# Altium PCB 2012_PerfUSB.PcbDoc
Units mil, origin at the board's own origin, x right, y up, seen from the top; angles counter-clockwise.
Board outline 690 x 1930 mil, 4 copper layers (1-TOP, 2-Signal, 3-GND, 4-BOT); 19 components, 18 nets, 82 pads, 27 vias.
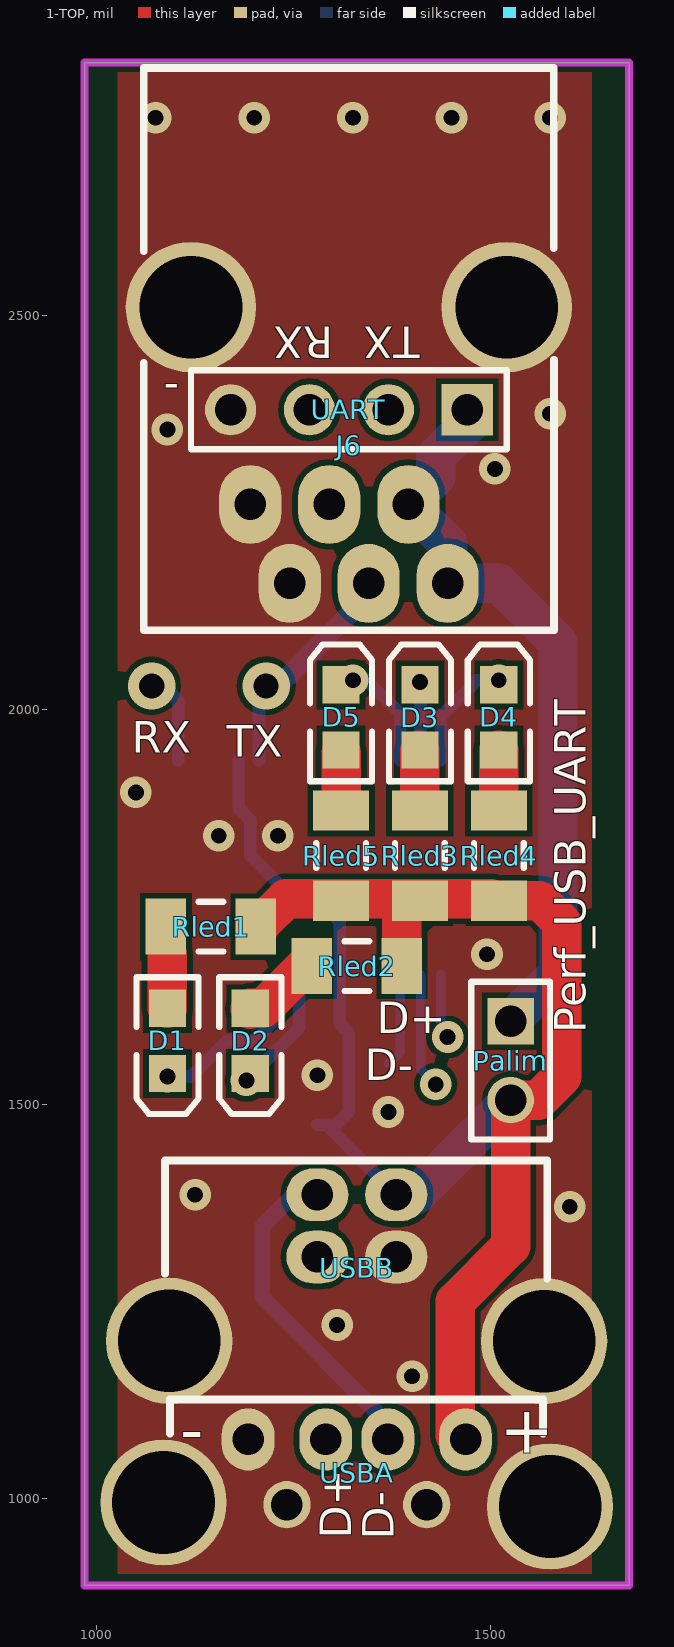
[diagram p0: 1-TOP view]
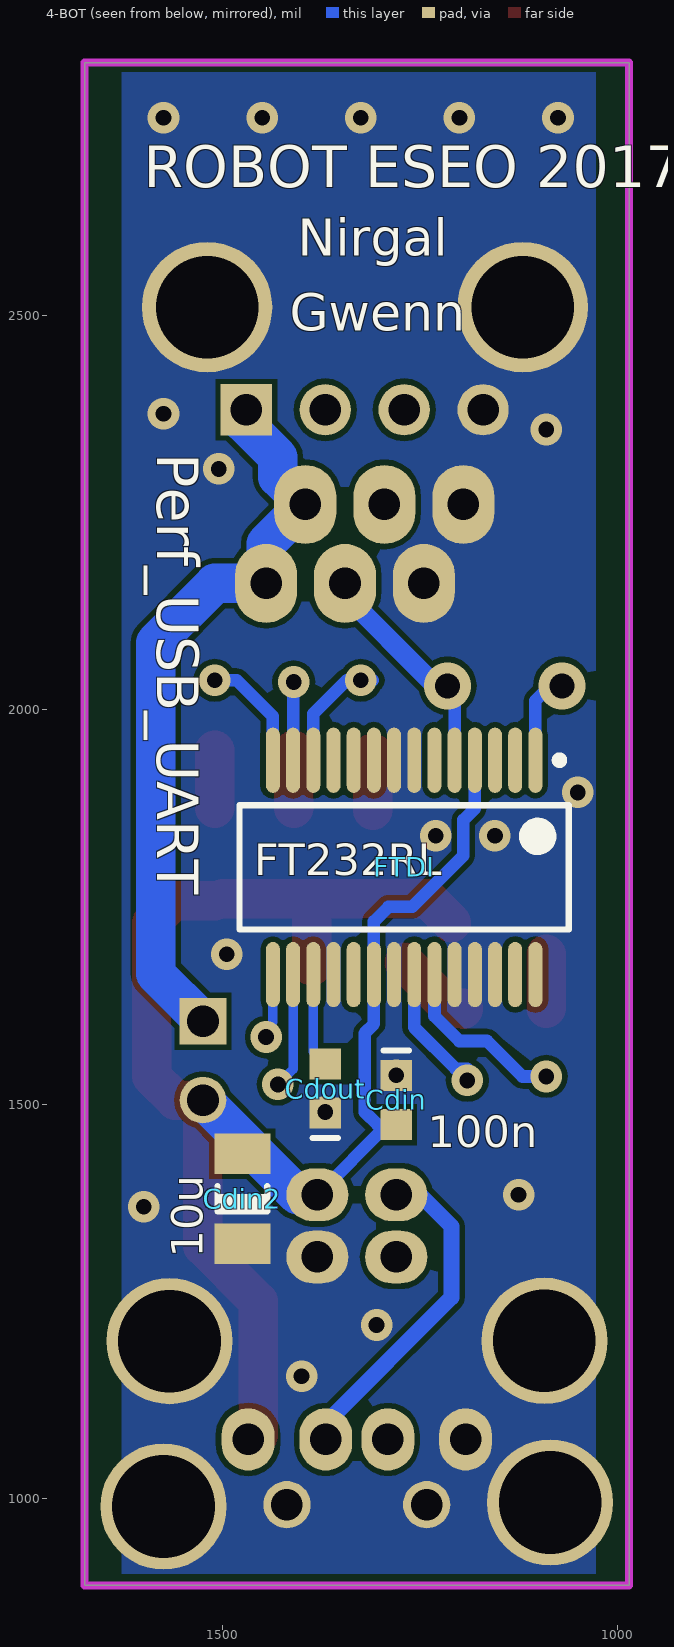
[diagram p1: 4-BOT view, seen from below]
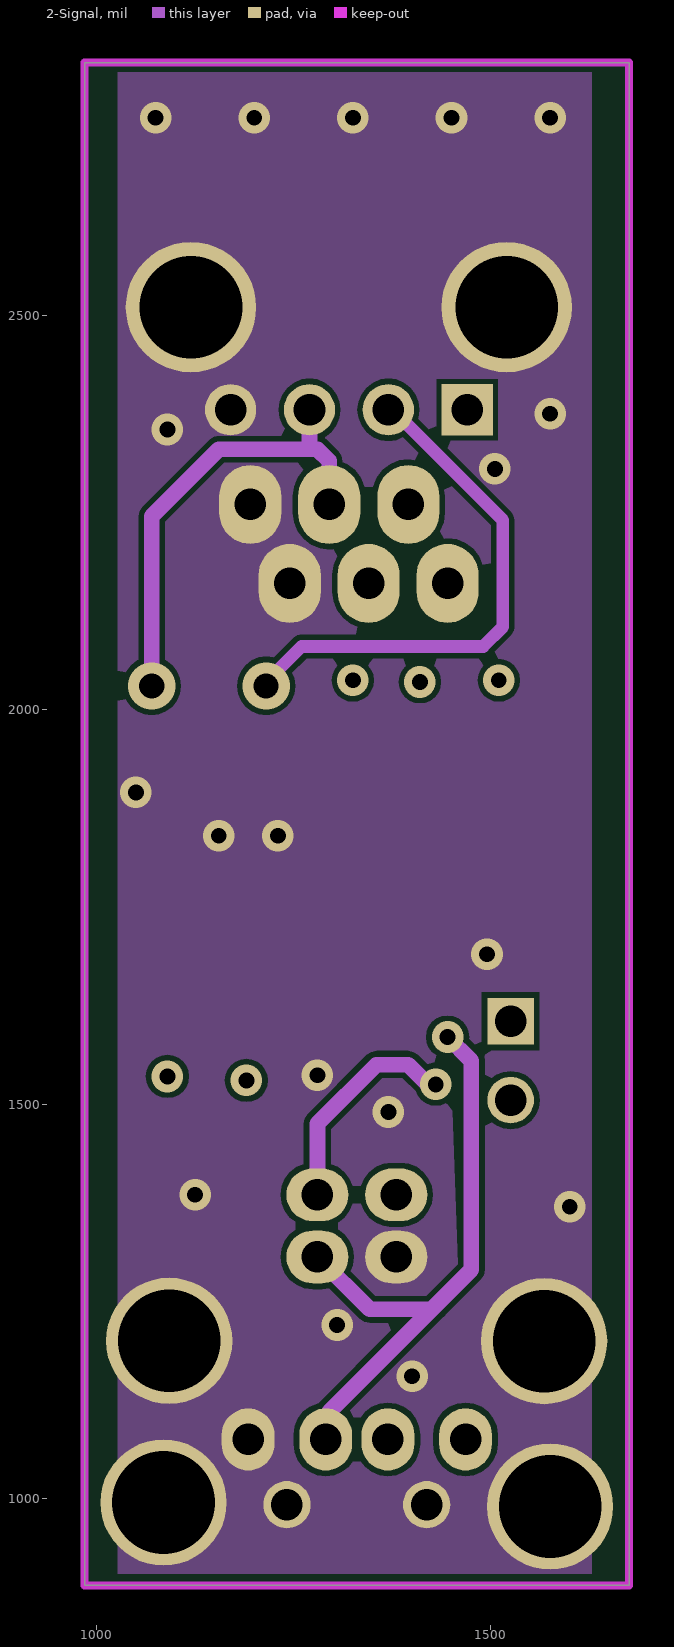
[diagram p2: 2-Signal]
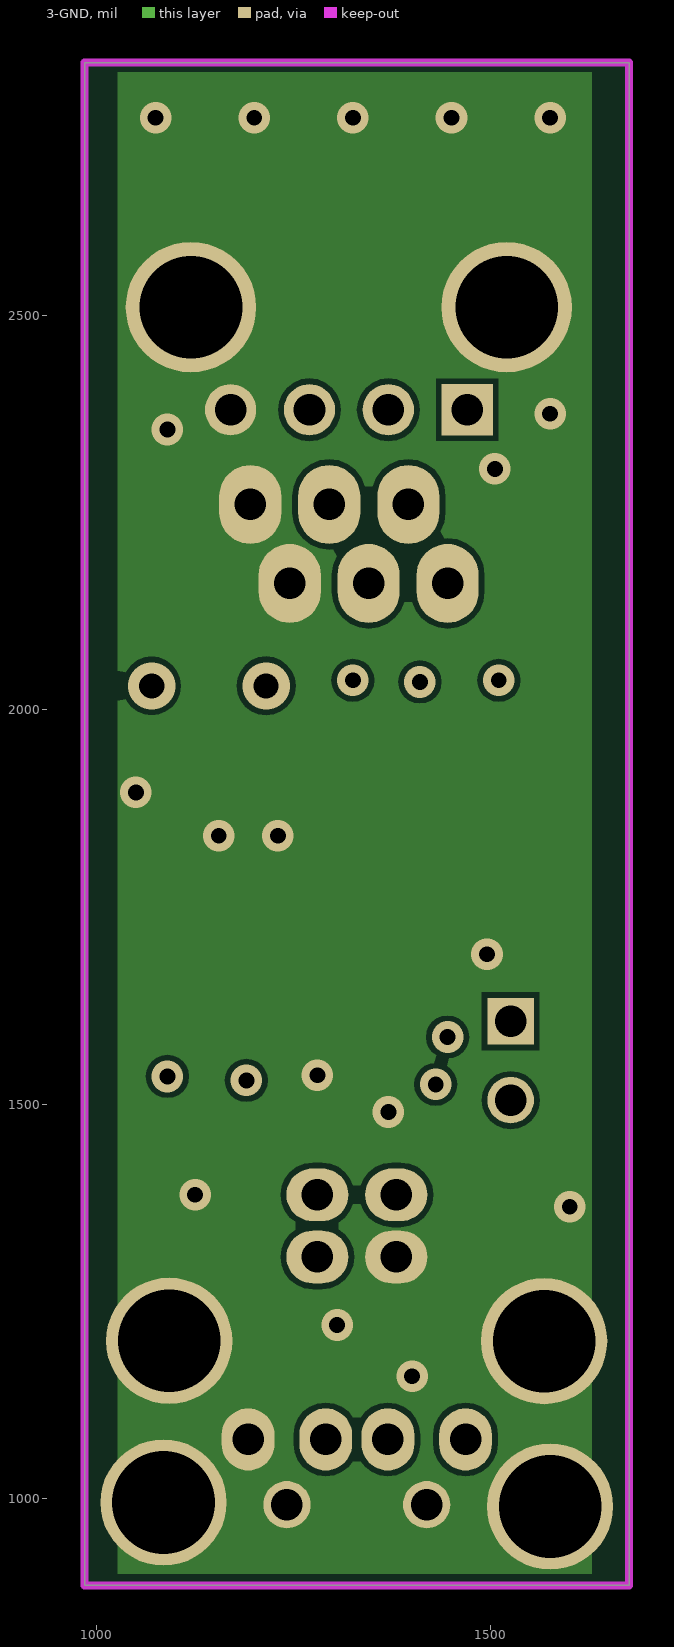
[diagram p3: 3-GND]
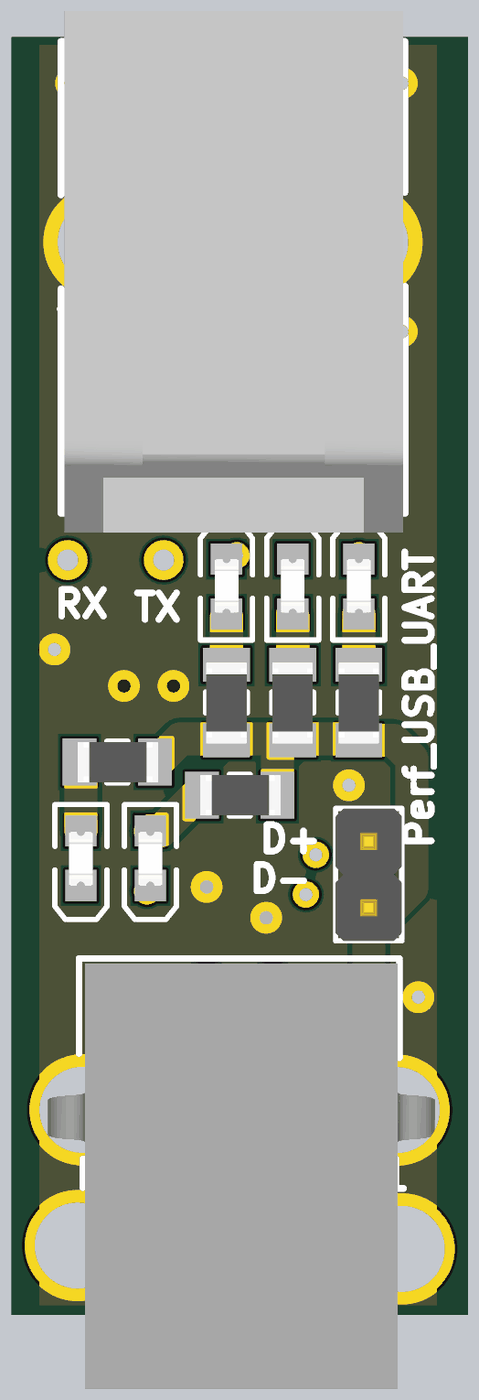
[diagram p4: 3D render of the assembled board from above, using the file's embedded part models]
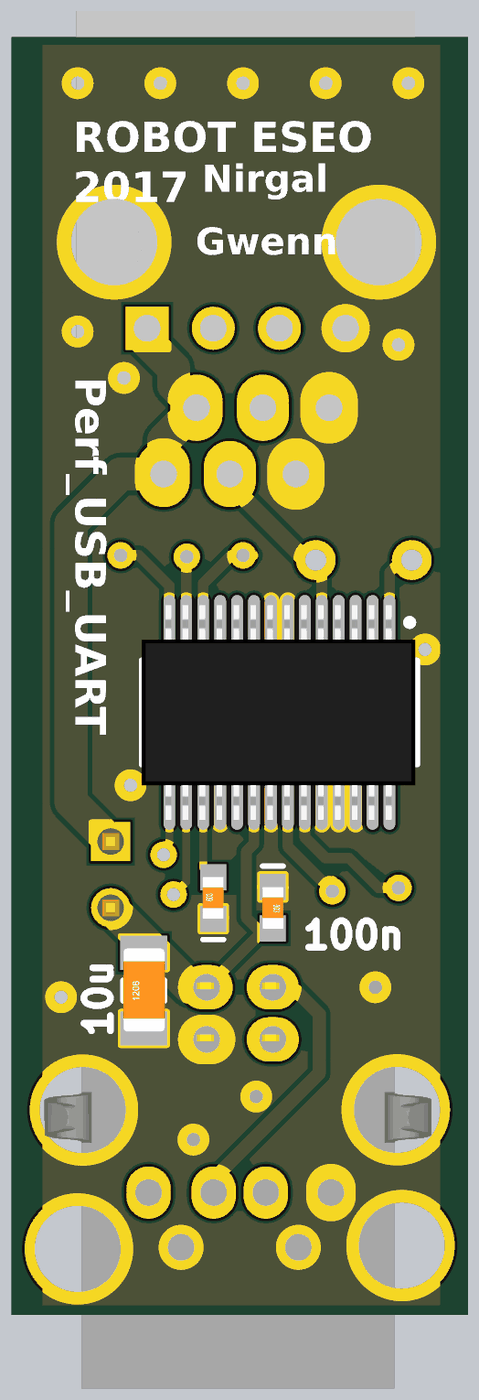
[diagram p5: 3D render of the assembled board from below, using the file's embedded part models]

## Layer stack, top to bottom
Top Solder: solder mask 0.4, Solder Resist, Dk 3.5
1-TOP: signal copper 1.4
Dielectric1: core 12.6, FR-4, Dk 4.8
2-Signal: signal copper 1.4
Dielectric2: prepreg 12.6, FR-4, Dk 4.8
3-GND: signal copper 1.4
Dielectric3: core 12.6, FR-4, Dk 4.8
4-BOT: signal copper 1.4
Bottom Solder: solder mask 0.4, Solder Resist, Dk 3.5

## Board outline
985,890 985,2820 1675,2820 1675,890

## Design rules (kind name [scope] priority, off if disabled: settings)
Clearance [All] p1: gap=7
HoleSize [All] p1: absolutevalues=TRUE maxlimit=200 minlimit=1 maxpercent=80.000 minpercent=20.000
PolygonConnect [All] p1: connectstyle=Direct reliefconductorwidth=10 reliefentries=4 polygonreliefangle="90 Angle" airgapwidth=10
RoomDefinition 2012_PerfUSB [InComponentClass('2012_PerfUSB')] p1: confinementstyle=ConfineIn formatcopy=TRUE lockcomponents=FALSE outline 0,0 2000,0 2000,1000 0,1000
RoutingVias [All] p1: holewidth=28 width=50 viastyle="Through Hole" minholewidth=28 minwidth=50 maxholewidth=28 maxwidth=50
SilkToSolderMaskClearance SilkscreenOverComponentPads [IsPad] p1: minsilkscreentomaskgap=10 clearancetoexposedcopper=TRUE
SolderMaskExpansion [All] p1: expansion=4
Width [All] p1: maxlimit=100 minlimit=12 preferedwidth=16
27 further rules are at their usual default settings.

## Components (designator, comment, footprint, x,y, rotation, side; value= is the part's Value field where it differs from the comment)
Cdin "100nF" C0603_N 1280,1505 r270 bottom
Cdin2 "10uF" C1206_N 1475,1380 r90 bottom
Cdout "100nF" C0603_N 1370,1520 r90 bottom
D1 "LED" LED_0805 1090,1580 r270 top
D2 "LED" LED_0805 1195,1580 r270 top
D3 "LED" LED_0805 1410,1990 r90 top
D4 "LED" LED_0805 1510,1990 r90 top
D5 "LED" LED_0805 1310,1990 r90 top
FTDI "IC_FT232RL" SSOP28_N 1270,1800 r270 bottom
J6 "UART" RJ11_6/6 1245,2160 r90 top
Palim "Jump" HDR1X2 1525,1605 r270 top
Rled1 "1K" R1206_N 1145,1725 r0 top
Rled2 "1K" R1206_N 1330,1675 r0 top
Rled3 "1K" R1206_N 1410,1815 r270 top
Rled4 "1K" R1206_N 1510,1815 r270 top
Rled5 "1K" R1206_N 1310,1815 r270 top
UART "BARRETTE4" HDR1X4 1470,2380 r180 top
USBA "USB_A" "USB_A_COUDE - FAR1696544" 1330,1075 r0 top
USBB "USB_B" USB_B_COUDE 1280,1385 r0 top

## Footprints (in the part's own frame and the unit in brackets; to place one, negate y for a bottom-side part, rotate by r counter-clockwise, add the part's x,y. Pads: shape width x height; smd on the part's side, far side on the other; paste and mask are expansions set on the pad)
C0603_N [mm] "Chip Capacitor, Body 1.6x0.8mm, IPC Medium Density"
  rect 1x1 smd: 1(-0.8,0) 2(0.787,0)
  silkscreen extent -1.6,-0.4 -1.6,0.4, body extent -0.8,-0.39 0.8,0.41, height 0.32
C1206_N [mm] "Chip Capacitor, Body 3.2x1.6mm, IPC Medium Density"
  rect 1.3x1.8 smd: 1(-1.45,0) 2(1.45,0)
  silkscreen extent -0.4,-0.8 0.4,0.8, body extent -1.57,-0.81 1.63,0.79, height 1.02
HDR1X2 [mm]
  rect 1.5x1.5 hole 1.016: 1(0,0)
  round 1.5 hole 1.016: 2(2.54,0)
  silkscreen extent -1.27,-1.27 3.81,1.27, body extent -1.27,-1.27 3.81,1.27, height 10.1
HDR1X4 [mil] "Connector; Header; 4 Position"
  rect 65x65 hole 40: 1(0,0)
  round 65 hole 40: 2(100,0) 3(200,0) 4(300,0)
  silkscreen extent -50,-50 350,50
LED_0805 [mm] "SM LED; 2 Flat Leads"
  rect 1.2x1.2 smd: 1(-1.05,0) 2(1.05,0)
  silkscreen extent -2.05,-1 2.35,1, body extent -1.05,-0.64 1.06,0.64, height 1.2
R1206_N [mm] "Chip Resistor, Body 3.2x1.6mm, IPC Medium Density"
  rect 1.3x1.8 smd: 1(-1.45,0) 2(1.45,0)
  silkscreen extent -0.4,-0.8 0.4,0.8, body extent -1.68,-0.87 1.68,0.87, height 0.71
RJ11_6/6 [mm] "Connector; RJ11; 6P/6C; Low Profil; Right Angle; Pin Spacing=2.54mm"
  oval 2.54x2 hole 1.016: 1(0,-5.08) 2(2.54,-3.82) 3(0,-2.54) 4(2.54,-1.27) 5(0,0) 6(2.54,1.27)
  round 4.2 hole 3.302: FIX1(8.89,3.18) FIX2(8.89,-6.98)
  silkscreen extent -1.51,-8.51 16.59,4.7, body extent -2.25,-8.43 17.75,4.57, height 16
SSOP28_N [mm] "SOP, 28-Leads, Body 10.2x5.3mm, Pitch 0.65mm, IPC Medium Density"
  oval 2.1x0.45 smd: 1(-3.45,4.225) 2(-3.45,3.575) 3(-3.45,2.925) 4(-3.45,2.275) 5(-3.45,1.625) 6(-3.45,0.975) 7(-3.45,0.325) 8(-3.45,-0.325) 9(-3.45,-0.975) 10(-3.45,-1.625) 11(-3.45,-2.275) 12(-3.45,-2.925) 13(-3.45,-3.575) 14(-3.45,-4.225) 15(3.45,-4.225) 16(3.45,-3.575) 17(3.45,-2.925) 18(3.45,-2.275) 19(3.45,-1.625) 20(3.45,-0.975) 21(3.45,-0.325) 22(3.45,0.325) 23(3.45,0.975) 24(3.45,1.625) 25(3.45,2.275) 26(3.45,2.925) 27(3.45,3.575) 28(3.45,4.225)
  silkscreen extent -3.57,-5.3 2,5.3, body extent -4.11,-5.3 4.11,5.3, height 1.99
"USB_A_COUDE - FAR1696544" [mil]
  oval 66.93x78.74 hole 40: 1(137.8,0) 2(39.37,0) 3(-39.37,0) 4(-137.8,0)
  round 160 hole 130: FIX1(-245,-80) FIX2(245,-85)
  round 60 hole 40: FIX1(-88.58,-82.68) FIX2(88.58,-82.68)
  silkscreen extent -237,7 236,51
USB_B_COUDE [mm] "Connector; USB; type B; 4 Position; Pin Spacing=2.54mm/12.07mm"
  oval 2x1.7 hole 1.016: 1(2.54,0) 2(0,0) 3(0,-2) 4(2.54,-2)
  round 4.064 hole 3.302: FIX1(-4.77,-4.7) FIX2(7.3,-4.71)
  silkscreen extent -4.9,-2.7 7.4,1.1, body extent -6.1,-15.39 8.76,0.91, height 10.75

## Part data
Cdin Cdin2 Cdout: library part Capacitor, "Capacitor"
D1 D2 D3 D4 D5: "Typical LED"
FTDI: "FT232R USB UART"
J6: library part CONNECTEUR_RJ12
Palim: library part "Jumper SIP2.54", "Jumper SIP2.54"
Rled1 Rled2 Rled3 Rled4 Rled5: library part Resistor, "Resistor"
UART: "Header, 4-Pin"
USBA: library part USB_B, "FAR1696544"

## Via types
v1: diameter 40, hole 20, 1-TOP to 4-BOT, 25 vias
v2: diameter 60, hole 32, 1-TOP to 4-BOT, 2 vias

## Nets (pads, with @x,y where several pads share a name; then routed paths per layer and width w, separated by ;. In a path a pad name is that pad's centre, name@x,y a point inside that pad or via, vN(x,y) a via of type N, cw(c..) or ccw(c..) an arc to the next point about the centre after c; other vN are vias at no path point)
5V: Cdin2.2 Cdin.2 FTDI.4 FTDI.20 Palim.2 Rled1.2 Rled2.2 Rled3.2 Rled4.2 Rled5.2 USBA.1 USBB.1 | length 2100
  1-TOP w50: Rled1.2@1210,1730 1240,1760 Rled4.2@1500,1760 ; Rled2.2 Rled3.2@1387.09,1752.09 ; USBA.1@1465,1070 1455,1080 1455,1250 1525,1320 Palim.2 1560,1505 1590,1535 1590,1730 1562.09,1757.91 Rled4.2
  4-BOT w16: FTDI.4 1180.43,1874.57 1195,1860 1195,1815 1260,1750 1290,1750 1308.39,1731.61 FTDI.20 1308.39,1601.61 1320,1590 1320,1490 1304,1474 Cdin.2@1291,1474 ; Cdin.2 Cdin.2@1291,1474 ; USBB.1 Cdin.2@1291,1474
  4-BOT w50: USBB.1 1405,1385 Palim.2
D+: FTDI.15 USBA.3 USBB.3 | length 854.3
  2-Signal w20: USBB.3 1346.26,1240 1425,1240 ; USBA.3@1295,1070 1295,1110 1425,1240 ; v1(1445,1585) 1475,1555 1475,1290 1430,1245 1425,1240
  4-BOT w12: FTDI.15 1436.34,1603.66 v1@1450,1590
D-: FTDI.16 USBA.2 USBB.2 | length 881.4
  2-Signal w20: USBB.2@1255,1385 USBB.2 1280,1475 1355,1550 1395,1550 1420,1525 v1(1430,1525)
  4-BOT w12: FTDI.16 1410.75,1544.25 v1(1430,1525)
  4-BOT w20: USBB.2 1250,1385 1210,1345 1210,1255 1370,1095 USBA.2@1370,1070
GND: Cdin2.1 Cdin.1 Cdout.1 FTDI.7 FTDI.8 FTDI.18 FTDI.21 FTDI.24 FTDI.25 FTDI.26 J6.5 J6.6 J6.FIX1 J6.FIX2 UART.4 USBA.4 USBA.FIX1 USBA.FIX2 USBB.4 USBB.FIX1 USBB.FIX2
  other v1: 1400,1155 1305,1220 1600,1370 1125,1385 1370,1490 1280,1536.5 1495,1690 1155,1840 1230,1840 1050,1895 1505,2305 1090,2355 1575,2375 1075,2750 1200,2750 1325,2750 1450,2750 1575,2750
LED1: D1.2 FTDI.23 | length 225.9
  4-BOT w16: v1(1090,1535) 1120,1535 1165,1580 1200,1580 1231.61,1611.61 FTDI.23
LED2: D2.2 FTDI.22 | length 170.8
  4-BOT w16: v1(1190,1530) 1190,1545 1205,1545 1257.2,1597.2 FTDI.22
LED3: D3.2 FTDI.13 | length 99.2
  4-BOT w16: FTDI.13 v1@1410.75,2035
  other v1: 1410,2035
LED4: D4.2 FTDI.14 | length 148.1
  4-BOT w16: FTDI.14 1436.34,1991.34 1482.09,2037.09 v1(1510,2037.09)
LED5: D5.2 FTDI.12 | length 151.7
  4-BOT w16: v1@1310,2037.09 1342.91,2037.09 1385.16,1994.84 FTDI.12
  other v1: 1325,2037.09
NetCdout_2: Cdout.2 FTDI.17 | length 119.5
  4-BOT w12: Cdout.2 1385.16,1566.16 FTDI.17
NetD1_1: D1.1 Rled1.1 | length 68.7
  1-TOP w50: D1.1 Rled1.1@1090,1690
NetD2_1: D2.1 Rled2.1 | length 100.6
  1-TOP w50: D2.1@1195,1620 D2.1 1211.34,1621.34 Rled2.1@1270,1680
NetD3_1: D3.1 Rled3.1 | length 73.7
  1-TOP w50: Rled3.1@1410,1875 D3.1
NetD4_1: D4.1 Rled4.1 | length 73.7
  1-TOP w50: Rled4.1@1510,1875 D4.1
NetD5_1: D5.1 Rled5.1 | length 72.9
  1-TOP w50: Rled5.1 D5.1@1310,1945
URX: FTDI.1 J6.4 UART.3 | length 685.4
  2-Signal w20: v2(1070,2030) 1070,2245 1155,2330 1270,2330 ; UART.3@1270,2370 1270,2330 ; J6.4 1295,2315 1280,2330 1270,2330
  4-BOT w16: v2@1080,2035 1103.66,2011.34 FTDI.1
UTX: FTDI.5 J6.3 UART.2 | length 937.8
  2-Signal w16: v2@1210,2030 1260,2080 1490,2080 1515,2105 1515,2240 1375,2380 UART.2
  4-BOT w16: FTDI.5 v2@1206.02,2028.98 ; v2@1225,2035 v2@1235,2035 ; J6.3@1345,2155 J6.3
  4-BOT w25: v2@1235,2035 J6.3@1345,2145
  other v2: 1215,2030
VDD_CARTE: J6.1 J6.2 Palim.1 UART.1 | length 934.4
  4-BOT w50: UART.1@1475,2365 1430,2320 1430,2294.61 J6.2 1445,2210.39 J6.1 1510,2160 1585,2085 1585,1665 Palim.1
pads on no net: FTDI.2 FTDI.3 FTDI.6 FTDI.9 FTDI.10 FTDI.11 FTDI.19 FTDI.27 FTDI.28

## Polygon pours and split planes (outlines as drawn)
GND on 1-TOP "1_GND" (solid, pour order 1001): 1025,2810 1630,2810 1630,905 1025,905
GND on 2-Signal "2_GND" (solid, pour order 1002): 1025,2810 1630,2810 1630,905 1025,905
GND on 3-GND "3_GND" (solid, pour order 1003): 1025,2810 1630,2810 1630,905 1025,905
GND on 4-BOT "4_GND" (solid, pour order 1000): 1025,2810 1630,2810 1630,905 1025,905

## Keep-outs
Keep-Out Layer:
  the board outline again, w10

## Silkscreen, mask and mechanical layers (free items; w line width, h text height)
Top Overlay:
  text "RX" at 1300,2485 h40 r180
  text "TX" at 1410,2485 h40 r180
  text "-" at 1105,2425 h40 r180
  text "RX" at 1045,1945 h40
  text "TX" at 1165,1940 h40
  text "D+" at 1355,1590 h40
  text "Perf_USB_UART" at 1620,1590 h40 r90
  text "D-" at 1340,1530 h40
Bottom Overlay:
  text "ROBOT ESEO 2017" at 1600,2645 h90
  text "Nirgal" at 1405,2560 h80
  text "Gwenn" at 1415,2465 h80
  text "Perf_USB_UART" at 1600,2325 h90 r90
  text "FT232RL" at 1460,1790 h40
  text "100n" at 1240,1445 h40
  text "10u" at 1525,1305 h40 r270

## Text inside footprints (layer, text, board x,y; h text height)
USBA: Top Overlay "+" at 1511,1058 h60; Top Overlay "-" at 1106,1059 h60; Top Overlay "D-" at 1377,948 h40 r90; Top Overlay "D+" at 1323,949 h40 r90